# Altium PCB RT5572.PcbDoc
Units mil, origin at the board's own origin, x right, y up, seen from the top; angles counter-clockwise.
Board outline 785.62 x 1959.32 mil, 4 copper layers (Top Layer, GND, Signal Layer 1, Bottom Layer), stack 39.217 mil thick; 121 components, 64 nets, 363 pads, 199 vias.
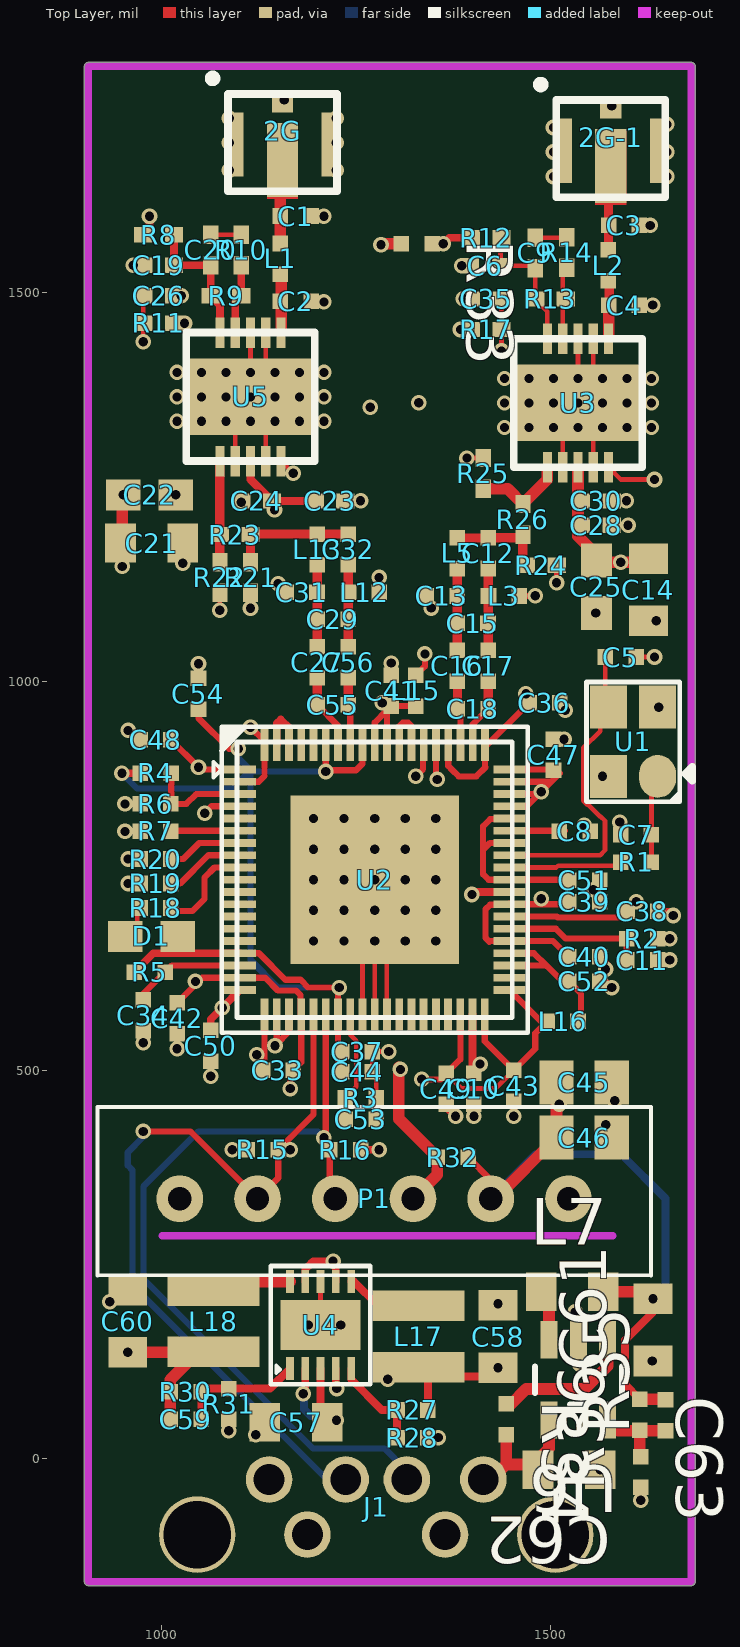
[diagram p0: Top Layer view]
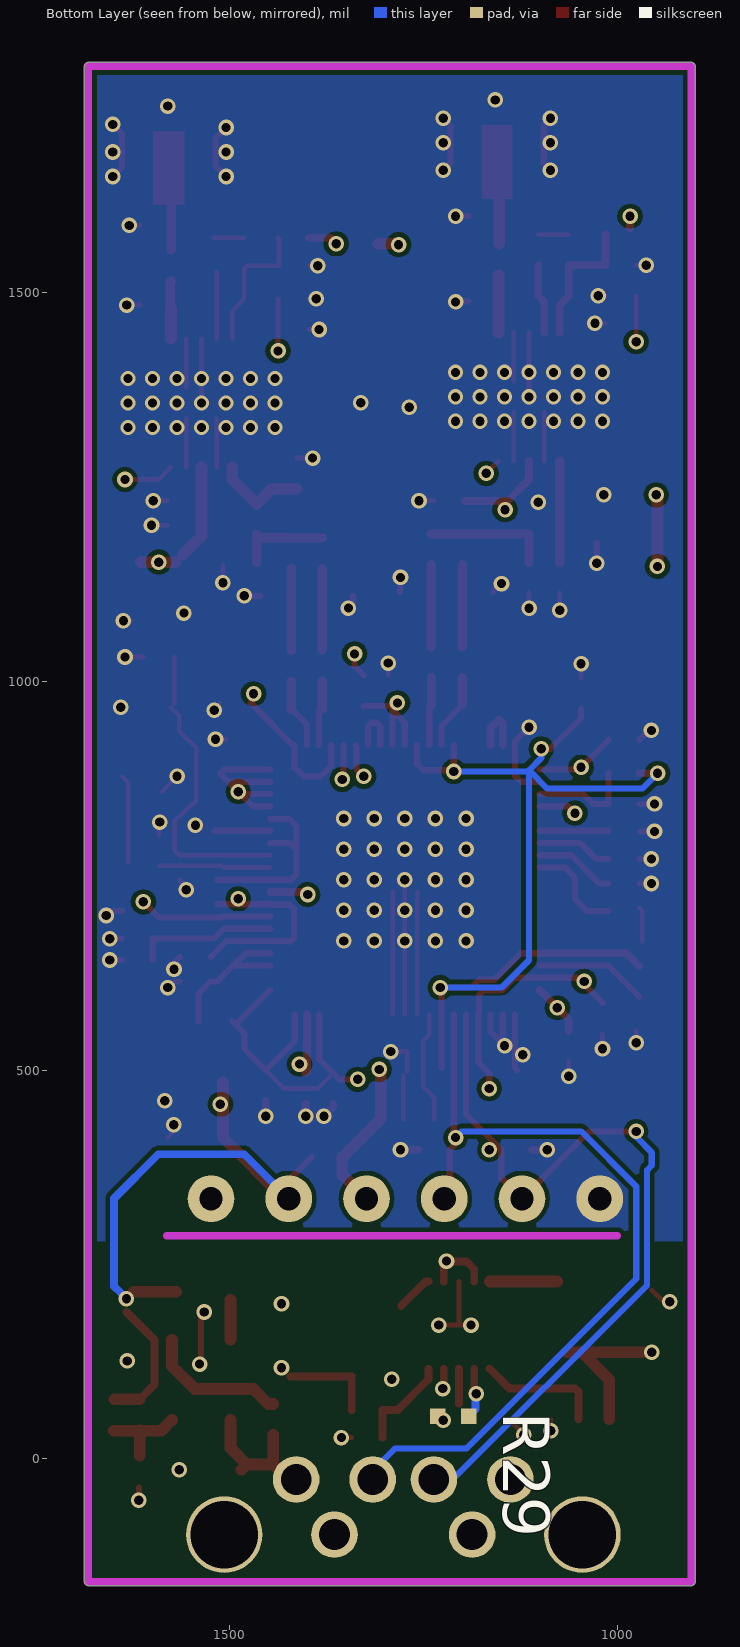
[diagram p1: Bottom Layer view, seen from below]
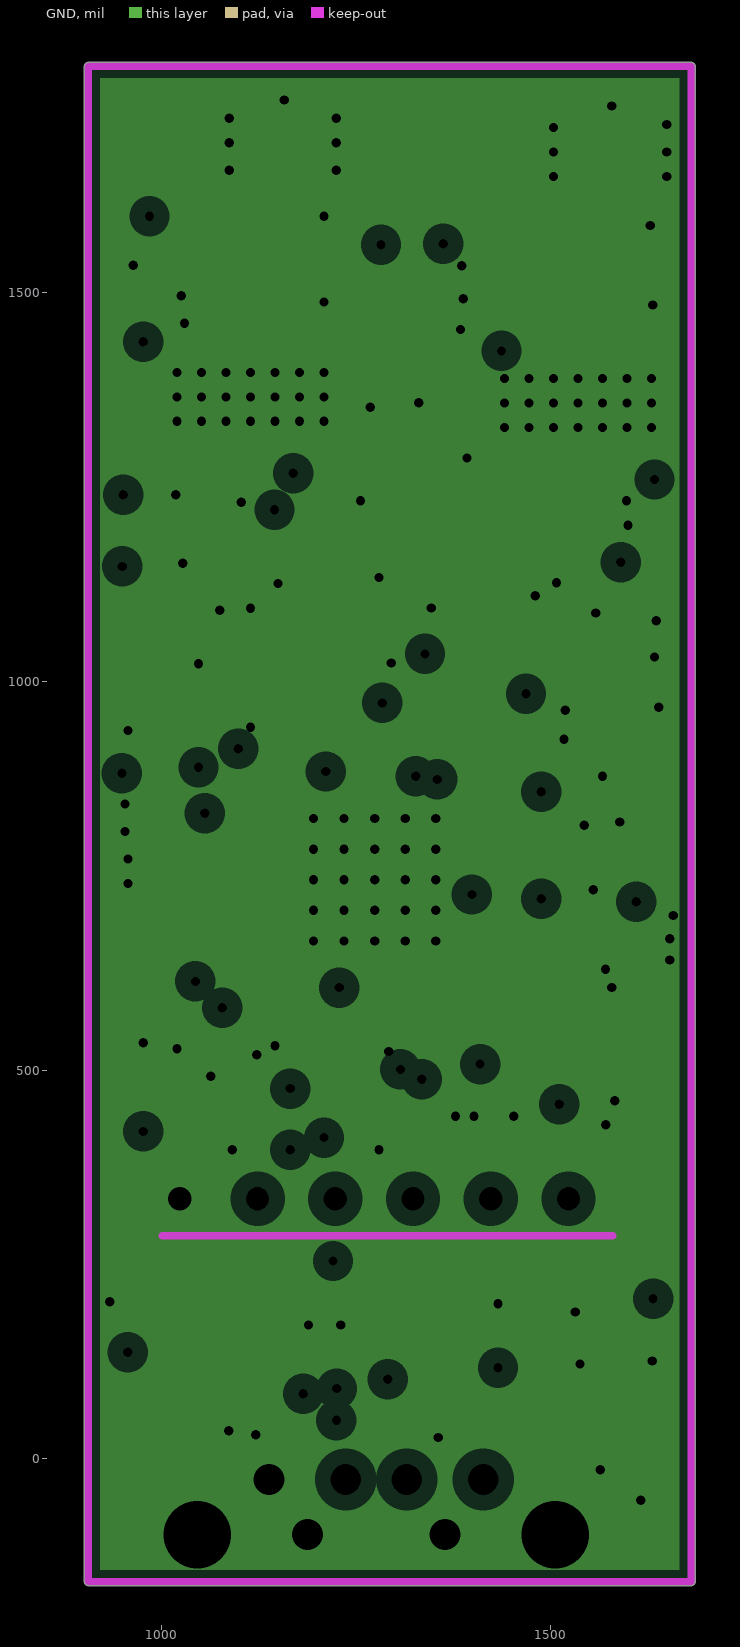
[diagram p2: GND, clearances drawn from the general rule]
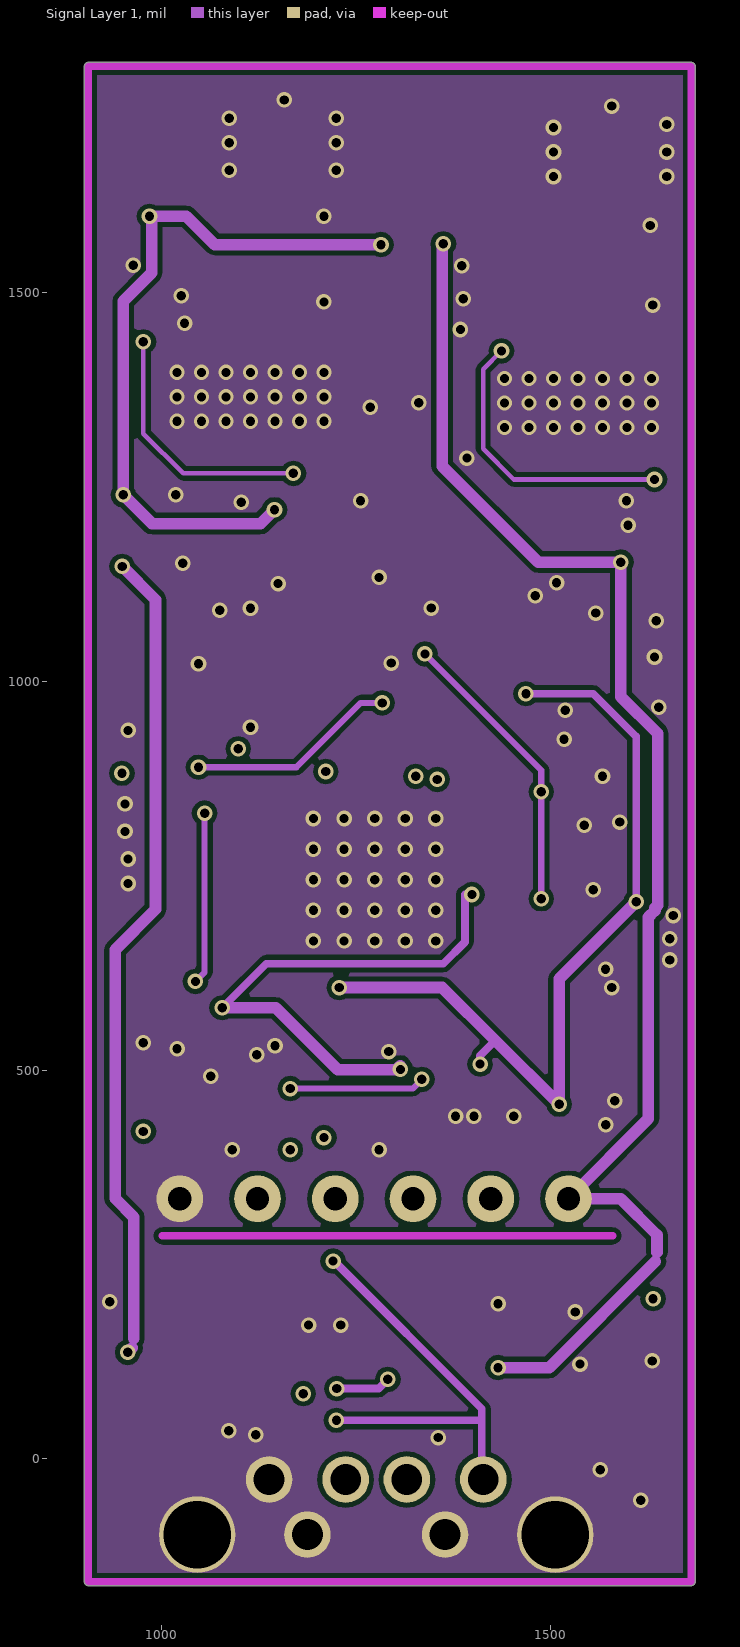
[diagram p3: Signal Layer 1]

## Layer stack, top to bottom
Top Solder: solder mask 0.4, Solder Resist, Dk 3.5
Top Layer: signal copper 1.4
Dielectric1: core 7.6772, FR-4, Dk 4.2
GND: plane copper 0.689, net GND
Dielectric 3: prepreg 19.685, Dk 4.2
Signal Layer 1: signal copper 0.689
Dielectric 2: core 7.6772, Dk 4.2
Bottom Layer: signal copper 1.4
Bottom Solder: solder mask 0.4, Solder Resist, Dk 3.5

## Board outline
905.51,-162.97 cw(c905.51,-157.95) 900.5,-157.95 900.5,1791.34 cw(c905.51,1791.34) 905.51,1796.35 1681.1,1796.35 cw(c1681.1,1791.34) 1686.12,1791.34 1686.12,-157.95 cw(c1681.1,-157.95) 1681.1,-162.97

## Design rules (kind name [scope] priority, off if disabled: settings)
Clearance [All] p1: gap=6
MinimumSolderMaskSliver [All] p1 off: minsoldermaskwidth=10
PlaneClearance [All] p1: clearance=20
PlaneConnect [All] p1: planeconnectstyle=Direct reliefexpansion=20 reliefentries=4 reliefconductorwidth=10 reliefairgap=10
PolygonConnect [All] p1: connectstyle=Direct reliefconductorwidth=10 reliefentries=4 polygonreliefangle="90 Angle" airgapwidth=10
RoomDefinition 4-USB-A [InComponentClass('4-USB-A')] p1 off: confinementstyle=ConfineIn formatcopy=TRUE lockcomponents=FALSE outline -5946.1,-8780 -3946.1,-8780 -3946.1,-7780 -5946.1,-7780
RoomDefinition 3-RT5572-WLAN [InComponentClass('3-RT5572-WLAN')] p2 off: confinementstyle=ConfineIn formatcopy=TRUE lockcomponents=FALSE outline -5946.1,-8780 -3946.1,-8780 -3946.1,-7780 -5946.1,-7780
RoomDefinition 2-FrontEnd [InComponentClass('2-FrontEnd')] p3 off: confinementstyle=ConfineIn formatcopy=TRUE lockcomponents=FALSE outline -5946.1,-8780 -3946.1,-8780 -3946.1,-7780 -5946.1,-7780
RoutingVias [All] p1: holewidth=12 width=20 viastyle="Through Hole" minholewidth=12 minwidth=20 maxholewidth=28 maxwidth=50
SilkToSilkClearance [All] p1 off: silktosilkclearance=10
SilkToSolderMaskClearance [IsPad] p1 off: minsilkscreentomaskgap=10 clearancetoexposedcopper=TRUE
SolderMaskExpansion [All] p1 off: expansion=4
UnpouredPolygon [All] p1: allowunpoured=FALSE
Width [All] p1: maxlimit=20 minlimit=6 preferedwidth=10
24 further rules are at their usual default settings.

## Classes and differential pairs
component class 2-FrontEnd: 2G 2G-1 5G C1 C2 C3 C4 C6 C9 C14 C19 C20 C21 C22 C23 C24 C25 C26 C28 C30 C35 L1 L2 R8 R9 R10 R11 R12 R13 R14 R17 R21 R22 R23 R24 R25 R26 R33 U3 U5
component class 3-RT5572-WLAN: C5 C7 C8 C10 C11 C12 C13 C15 C16 C17 C18 C27 C29 C31 C32 C33 C34 C36 C37 C38 C39 C40 C41 C42 C43 C44 C45 C46 C47 C48 C49 C50 C51 C52 C53 C54 C55 C56 D1 L3 L5 L12 L13 L15 L16 R1 R2 R3 R4 R5 R6 R7 R18 R19 R20 U1 U2
component class 4-USB-A: C57 C58 C59 C60 C61 C62 C63 J1 L7 L17 L18 P1 R15 R16 R27 R28 R29 R30 R31 R32 R34 R35 R36 U4 U6

## Components (designator, comment, footprint, x,y, rotation, side; value= is the part's Value field where it differs from the comment)
2G "IPEX" IPEX 1157.36,1688.74 r0 top
2G-1 "IPEX" IPEX 1579.57,1680.87 r0 top
C1 "0.3pF" 0402#1 1172.36,1598.74 r0 top
C2 "0.3pF" 0402#1 1172.36,1489.06 r0 top
C3 "0.3pF" 0402#1 1594.49,1586.61 r0 top
C4 "0.3pF" 0402#1 1594.49,1484.25 r0 top
C5 "8.2pF" 0402#1 1590.55,1031.5 r180 top
C6 "Cap" 0402#2 1416.08,1534.94 r0 top
C7 "47pF" 0402#1 1610.24,803.15 r180 top
C8 "22nF" 0402#1 1531.5,807.09 r180 top
C9 "Cap" 0402#2 1480.32,1551.18 r270 top
C10 "0.1uF" 0402#1 1401.57,476.38 r270 top
C11 "100pF" 0402#1 1618.11,641.73 r180 top
C12 "1.2pF" 0402#1 1420,1165 r90 top
C13 "1.2pF" 0402#1 1360,1110 r0 top
C14 "Cap" 0805#1 1625.98,1118.11 r270 top
C15 "NI" 0402#1 1400,1075 r180 top
C16 "1.2pF" 0402#1 1380,1020 r90 top
C17 "1.2pF" 0402#1 1420,1020 r90 top
C18 "1pF" 0402#1 1400,965 r0 top
C19 "Cap" 0402#2 996.06,1535.43 r0 top
C20 "Cap" 0402#2 1062.99,1555.12 r270 top
C21 "Cap" 0805#1 987,1178 r0 top
C22 "Cap" 0603 984,1240 r0 top
C23 "Cap" 0402#2 1216.54,1232.28 r0 top
C24 "Cap" 0402#2 1122.05,1232.28 r180 top
C25 "Cap" 0603 1559.06,1122.05 r270 top
C26 "Cap" 0402#2 996.06,1496.06 r0 top
C27 "2pF" 0402#1 1200,1025 r270 top
C28 "Cap" 0402#2 1559.06,1200.79 r0 top
C29 "1.2pF/NI" 0402#1 1220,1080 r180 top
C30 "Cap" 0402#2 1559.06,1232.28 r0 top
C31 "1pF" 0402#1 1180,1115 r180 top
C32 "1pF" 0402#1 1240,1170 r270 top
C33 "1uF" 0402#1 1149.61,500 r180 top
C34 "0.1uF" 0402#1 976.38,570.87 r270 top
C35 "Cap" 0402#2 1417.32,1492.13 r180 top
C36 "5.6pF" 0402#1 1492.13,972.44 r0 top
C37 "0.1uF" 0402#1 1251,524 r0 top
C38 "0.1uF" 0402#1 1618.11,704.72 r0 top
C39 "0.1uF" 0402#1 1543.31,716.54 r0 top
C40 "NI" 0402#1 1543.31,645.67 r0 top
C41 "1uF" 0402#1 1295.28,988.19 r90 top
C42 "0.1uF" 0402#1 1019.69,566.93 r270 top
C43 "1uF/NI" 0402#1 1452.76,480.32 r270 top
C44 "1uF" 0402#1 1251,498 r0 top
C45 "10uF" 0805#2 1543.31,484.25 r0 top
C46 "10uF" 0805#2 1543.31,413.39 r0 top
C47 "1uF" 0402#1 1503.94,905.51 r90 top
C48 "1uF" 0402#1 992.13,925.2 r180 top
C49 "0.1uF" 0402#1 1366.14,476.38 r270 top
C50 "1uF" 0402#1 1062.99,531.5 r270 top
C51 "1uF" 0402#1 1543.31,744.09 r0 top
C52 "0.1uF" 0402#1 1543.31,614.17 r0 top
C53 "1pF" 0402#1 1255.91,437.01 r0 top
C54 "0.1uF" 0402#1 1047.24,984.25 r90 top
C55 "1pF" 0402#1 1220,970 r180 top
C56 "2pF" 0402#1 1240,1025 r270 top
C57 "10UF" 0805#1 1172.72,47.18 r0 top
C58 "22UF" 0805#1 1432.56,157.42 r270 top
C59 "33pF" 0402#1 1030.98,51.12 r180 top
C60 "22UF" 0805#1 956.18,177.1 r270 top
C61 "Cap" 0805#1 1632,166 r90 top
C62 "Cap" 0805#1 1524,-14 r180 top
C63 "Cap" 0402#1 1615,57 r270 top
D1 "LED" 0603 987,672 r180 top
J1 "USB" USB-A-MALE 1275.59,-102.36 r270 top
L1 "1nH" 0402#1 1152.36,1543.74 r270 top
L2 "1nH" 0402#1 1574.57,1535.55 r270 top
L3 "3.0nH" 0402#1 1440,1110 r0 top
L5 "3.0nH" 0402#1 1380,1165 r270 top
L7 "2.2uH" 0805#1 1528,215 r0 top
L12 "2.7nH" 0402#1 1260,1115 r0 top
L13 "2.7nH" 0402#1 1200,1170 r270 top
L15 "0 ohm" 0402#1 1326.77,988.19 r270 top
L16 "0 ohm" 0402#1 1515.75,562.99 r180 top
L17 "2.2UH" L3015 1330.2,196.79 r270 top
L18 "3.3UH" L3015 1066.42,216.47 r270 top
P1 "*" 6PSocket 1173.23,334.65 r0 top
R1 "0 ohm" 0402#1 1610.24,767.72 r180 top
R2 "12K" 0402#1 1618.11,669.29 r180 top
R3 "8.2K" 0402#1 1255.91,464.57 r0 top
R4 "1K" 0402#1 992.13,881.89 r0 top
R5 "100K" 0402#1 984.25,625.98 r0 top
R6 "1K/NI" 0402#1 992.13,842.52 r180 top
R7 "4.7K" 0402#1 992.13,807.09 r180 top
R8 "Res2" 0402#2 996.06,1574.8 r0 top
R9 "Res2" 0402#2 1082.68,1496.06 r0 top
R10 "Res2" 0402#2 1102.36,1555.12 r270 top
R11 "Res2" 0402#2 996.06,1460.63 r180 top
R12 "Res2" 0402#2 1417.32,1570.87 r0 top
R13 "Res2" 0402#2 1500,1492.13 r0 top
R14 "Res2" 0402#2 1520.92,1551.67 r270 top
R15 "1M/NI" 0402#1 1129.92,397.64 r0 top
R16 "1M/NI" 0402#1 1236.22,397.64 r180 top
R17 "Res2" 0402#2 1417.32,1452.76 r0 top
R18 "330R" 0402#1 992.13,708.66 r180 top
R19 "4.7K" 0402#1 992.13,740.16 r180 top
R20 "4.7K" 0402#1 992.13,771.65 r180 top
R21 "TBD" 0402#2 1114.17,1133.86 r270 top
R22 "TBD" 0402#2 1074.8,1133.86 r90 top
R23 "TBD" 0402#2 1094.49,1188.98 r180 top
R24 "TBD" 0402#2 1488.19,1149.61 r180 top
R25 "TBD" 0402#2 1413.39,1267.72 r270 top
R26 "TBD" 0402#2 1464.57,1208.66 r90 top
R27 "270k" 0402#1 1322.32,62.93 r0 top
R28 "180k" 0402#1 1322.32,27.5 r0 top
R29 "10k" 0402#1 1212,55 r180 bottom
R30 "300k" 0402#1 1030.98,86.55 r180 top
R31 "68k" 0402#1 1086.1,70.8 r270 top
R32 "0R" 0402#1 1374,388 r0 top
R33 "NC/0R" 0402#1 1328,1563 r0 top
R34 "10k" 0402#1 1443,51 r270 top
R35 "45k" 0402#1 1648,56 r90 top
R36 "10k" 0402#1 1616,-17 r90 top
U1 "XTAL/3.2x2.5/40MHz/85C" XTAL-SMD/3.2X2.5 1606.3,921.26 r270 top
U2 "RT5572-QFN76" QFN40P-900X900X90-77N 1273.9,745 r0 top
U3 "Sky65174-21" SKY65174-21 1535.43,1358.27 r90 top
U4 "Tps62410" DFN-10P-3X3 1204.21,173.17 r90 top (schematic designator U3)
U5 "Sky65174-21" SKY65174-21 1114.17,1366.14 r90 top
U6 "RT8059" SOT23-5 1536.1,102 r180 top

## Footprints (in the part's own frame and the unit in brackets; to place one, negate y for a bottom-side part, rotate by r counter-clockwise, add the part's x,y. Pads: shape width x height; smd on the part's side, far side on the other; paste and mask are expansions set on the pad)
6PSocket [mil]
  round 60 hole 30: 1(-150,0) 2(-50,0) 3(50,0) 4(150,0) 5(250,0) 6(350,0)
  silkscreen extent -256,-99 456,118
0402#1 [mil] "0402-RES"
  rect 20x20 smd: 1(-19.69,0) 2(20,0)
0402#2 [mil] "Chip Capacitor, Body 1.0x0.5mm, IPC High Density"
  rect 23.62x19.68 smd: 1(-19.68,0) 2(19.69,0)
  body extent -22,-12 22,12, height 51
0603 [mil] "0603-RES"
  rect 44x40 smd: 1(-33.46,0) 2(34,0)
0805#1 [mil]
  rect 39.37x50 smd: 1(-40,0) 2(40,0)
  body extent -50,-30 50,30, height 31
0805#2 [mil]
  rect 44x57 smd: 1(-35.5,0) 2(35.5,0)
DFN-10P-3X3 [mm]
  rect 0.75x0.25 smd mask+0.064: 1(-1.451,0.999) 2(-1.451,0.499) 3(-1.451,-0.001) 4(-1.451,-0.501) 5(-1.451,-1.001) 6(1.4,-1.001) 7(1.4,-0.501) 8(1.4,-0.001) 9(1.4,0.499) 10(1.4,0.999)
  rect 1.64x2.6 smd: 11(-0.025,-0.001)
  silkscreen extent -1.96,-1.63 1.9,1.62
IPEX [mil]
  rect 40x95 smd: 1(-2,-18)
  rect 19.68x82.68 smd: 2(-62,2) 2(58,2)
  rect 27.56x27.56 smd: 2(-2,57)
  Top Layer region: -22,-68 18,-68 18,27 -22,27
  silkscreen extent -97,-58 68,92
L3015 [mm]
  rect 1x3 smd: 1(0,0) 2(2,0)
QFN40P-900X900X90-77N [mm]
  rect 1.05x0.254 smd mask+0: 1(-4.4,3.6) 2(-4.4,3.2) 3(-4.4,2.8) 4(-4.4,2.4) 5(-4.4,2) 6(-4.4,1.6) 7(-4.4,1.2) 8(-4.4,0.8) 9(-4.4,0.4) 10(-4.4,0) 11(-4.4,-0.4) 12(-4.4,-0.8) 13(-4.4,-1.2) 14(-4.4,-1.6) 15(-4.4,-2) 16(-4.4,-2.4) 17(-4.4,-2.8) 18(-4.4,-3.2) 19(-4.4,-3.6)
  rect 0.254x1.05 smd: 20(-3.601,-4.4) 21(-3.201,-4.4) 22(-2.801,-4.4) 23(-2.401,-4.4) 24(-2.001,-4.4) 25(-1.601,-4.4) 26(-1.201,-4.4) 27(-0.801,-4.4) 28(-0.401,-4.4) 29(-0.001,-4.4) 30(0.399,-4.4) 31(0.799,-4.4) 32(1.199,-4.4) 33(1.599,-4.4) 34(1.999,-4.4) 35(2.399,-4.4) 36(2.799,-4.4) 37(3.199,-4.4) 38(3.599,-4.4) 58(3.602,4.4) 59(3.202,4.4) 60(2.802,4.4) 61(2.402,4.4) 62(2.002,4.4) 63(1.602,4.4) 64(1.202,4.4) 65(0.802,4.4) 66(0.402,4.4) 67(0.002,4.4) 68(-0.398,4.4) 69(-0.798,4.4) 70(-1.198,4.4) 71(-1.598,4.4) 72(-1.998,4.4) 73(-2.398,4.4) 74(-2.798,4.4) 75(-3.198,4.4) 76(-3.598,4.4)
  rect 1.05x0.254 smd: 39(4.4,-3.6) 40(4.4,-3.2) 41(4.4,-2.8) 42(4.4,-2.4) 43(4.4,-2) 44(4.4,-1.6) 45(4.4,-1.2) 46(4.4,-0.8) 47(4.4,-0.4) 48(4.4,0) 49(4.4,0.4) 50(4.4,0.8) 51(4.4,1.2) 52(4.4,1.6) 53(4.4,2) 54(4.4,2.4) 55(4.4,2.8) 56(4.4,3.2) 57(4.4,3.6)
  rect 5.5x5.5 smd: 77(0,0)
  silkscreen extent -5.26,-5 5,5
SKY65174-21 [mm]
  rect 2.5x4.4 smd: 0(0,0)
  rect 1x0.3 smd: 1(-2.1,1) 2(-2.1,0.5) 3(-2.1,0) 4(-2.1,-0.5) 5(-2.1,-1) 6(2.1,-1) 7(2.1,-0.5) 8(2.1,0) 9(2.1,0.5) 10(2.1,1)
  silkscreen extent -2.1,-2.1 2.1,2.1
SOT23-5 [mil] "SOT23-5"
  rect 22x48 smd: 1(-37.4,-51.18) 2(0,-51.18) 3(38,-51.18) 4(38,52) 5(-37.4,52)
  silkscreen extent -56,-17 56,32
USB-A-MALE [mil]
  round 98.43 hole 86.61: 0(-5,230.63) 0(-5,-230)
  round 60 hole 40: 0(-5,88.9) 0(-5,-88.27) 4(-75.87,-137.48)
  round 60 hole 39.37: 1(-75.87,138.11) 2(-75.87,39.69) 3(-75.87,-39.06)
  body extent 3,-234 743,239, height 157
XTAL-SMD/3.2X2.5 [mm]
  oval 1.4x1.2 smd mask+0.051: 1(1.1,0.8)
  rect 1.4x1.2 smd mask+0.051: 2(-1.163,0.8) 3(-1.162,-0.8) 4(1.1,-0.8)
  silkscreen extent -1.98,-1.52 1.93,1.93

## Part data
2G 2G-1: library part ANT-RA-USB-1
C1 C2 C3 C4 C5 C7 C8 C10 C11 C12 C13 C15 C16 C17 C18 C27 C29 C31 C32 C33 C34 C36 C37 C38 C39 C40 C41 C42 C43 C44 C47 C48 C49 C50 C51 C52 C53 C54 C55 C56 C57 C58 C59 C60: library part CAP/0402
C6 C9 C14 C19 C20 C21 C22 C23 C24 C25 C26 C28 C30 C35 C61 C62 C63: "Capacitor"
C45 C46: library part CAP/0603
D1: library part LED/0603
L1 L2 L3 L5 L13 L15 L16: library part L/0402
L7: library part Inductor, "Inductor"
L12: library part L/0402_0
L17 L18: library part L/2.5*2.0
P1: library part 6PSocket
R1 R2 R5: library part RES/0402_1_Dup1
R3 R15 R16: library part RES/0402_2
R4 R6 R7 R19 R20: library part RES/0402_1_Dup2
R8 R9 R10 R11 R12 R13 R14 R17: "Resistor"
R18: library part RES/0402_1
R21 R22 R23 R24 R25 R26 R33 R34 R35 R36: library part Res2, "Resistor"
R27 R28 R29 R30 R31 R32: library part RES/0402_3
U1: library part XTAL_2.5
U2: library part RT5572_5

## Via types
v1: diameter 20, hole 12, Top Layer to Bottom Layer, 132 vias
v2: diameter 19.68, hole 11.81, Top Layer to Bottom Layer, 42 vias
v3: diameter 20/20/20 (per signal layer), hole 12, Top Layer to Bottom Layer, 25 vias

## Nets (pads, with @x,y where several pads share a name; then routed paths per layer and width w, separated by ;. In a path a pad name is that pad's centre, name@x,y a point inside that pad or via, vN(x,y) a via of type N, cw(c..) or ccw(c..) an arc to the next point about the centre after c; other vN are vias at no path point)
1.2VA: C52.1 L16.1 U2.41 U2.42 | length 198.8
  Top Layer w8: U2.41 1494.53,634.76 ; U2.42 1478.78,650.51 1494.53,634.76 ; 1496.06,633.23 1494.53,634.76 ; L16.1@1539.37,562.99 1539.37,598.43 C52.1 1515.12,614.17 1494.53,634.76
1.2VD: C33.1 C42.1 C43.1 C49.1 L16.2 U2.4 U2.18 U2.23 U2.36 U2.38 U2.39 | length 1206.1
  Top Layer w6: C49.1 1385.83,476.38 1429.13,476.38 C43.1
  Top Layer w8: C42.1 1052.08,619.01 U2.18 1132.96,619.01 1149.53,602.44 1172.77,602.44 1178.63,596.58 1178.63,572.52 U2.23 1179.38,510.09 C33.1 1165.35,496.06 v1(1165.35,476.38) ; v1(1055.12,830.71) 1063.89,839.49 U2.4 ; v1(1334.65,488.19) 1358.27,488.19 C49.1 1384.1,514.03 U2.36 ; U2.38 1415.6,537.16 C43.1 1480.32,527.56 1480.32,547.56 L16.2 ; U2.39 L16.2@1491.57,558.82
  Signal Layer 1 w8: v1(1043.31,614.17) 1055.12,625.99 v1(1055.12,830.71) ; v1(1165.35,476.38) 1322.83,476.38 v1(1334.65,488.19)
1.2VPLL: C51.1 U2.48 U2.51 U2.53 | length 241.6
  Top Layer w8: U2.51 1422.17,792.24 1413.39,783.46 ; U2.53 1446.38,822.99 1422.31,822.99 1413.39,814.06 1413.39,783.46 ; C51.1@1514.84,745 U2.48 1420.35,745 1413.39,751.97 1413.39,783.46
1.2VRF: C39.1 C40.1 C47.1 L15.1 U2.43 U2.46 U2.54 U2.55 U2.56 U2.57 | length 909.8
  Top Layer w8: L15.1 1338.58,1019.68 v1(1338.58,1035.43) ; U2.46@1447.13,714.25 U2.46 ; U2.54 1469.41,839.49 v1@1485.16,855.24 ; U2.55 v1@1485.16,855.24 ; U2.56 1500.91,870.98 ; U2.57 C47.1@1506.97,886.73 ; v1(1488.19,720.47) v1@1481.22,713.5 ; C47.1@1511.81,881.89 1500.91,870.98 ; C39.1@1514.84,713.5 v1@1481.22,713.5 ; C40.1 1503.03,666.26 U2.43 1422.17,666.26 1421.26,665.35 1416.46,670.16 1416.46,706.9 1422.31,712.76 1446.38,712.76 U2.46 ; U2.46 v1@1481.22,713.5 ; v1@1485.16,855.24 v1(1488.19,858.27) 1500.91,870.98
  Signal Layer 1 w8: v1(1338.58,1035.43) 1488.19,885.83 v1(1488.19,858.27) v1(1488.19,720.47)
1.2VRF1: C41.1 C48.1 L15.2 U2.1 U2.66 U2.67 | length 502.8
  Top Layer w8: C48.1 v1(1047.24,889.76) 1050.28,886.73 U2.1 ; U2.67 1273.97,947.19 1289.71,962.94 U2.66 ; C41.1 1326.46,968.5 L15.2
  Signal Layer 1 w8: v1(1047.24,889.76) 1173.23,889.76 1255.91,972.44 v1(1283.46,972.44)
3.3V: C10.1 C36.1 C37.1 C38.1 C44.1 C45.1 C46.1 C54.1 C61.2 C63.1 D1.1 L7.2 P1.5 R4.1 R5.1 R32.2 R35.2 U2.16 U2.26 U2.37 U2.45 U2.58 U2.61 U2.68 U2.71 | length 3669.5
  Top Layer w8: C54.1 1047.24,952.76 1086.61,913.39 v1(1098.43,913.39) ; U2.16 1125.08,650.51 1159.15,616.44 1178.57,616.44 1188.72,606.3 v1@1226.62,606.3 ; v1(1210.97,884.2) v1@1210.97,891.39 ; U2.71 v1@1210.97,891.39 ; v1@1224.41,602.36 v1@1226.62,604.58 ; C44.1@1226.62,502.69 U2.26 v1@1226.62,604.58 ; U2.68 1258.22,894.17 1249.88,885.83 1216.54,885.83 v1@1210.97,891.39 ; U2.61 1368.45,891.39 1374.02,885.83 1381.89,877.95 1404.65,877.95 1416.46,889.76 1415.7,890.52 U2.58 1418.23,918.23 C36.1 ; R32.2 P1.5@1423.23,358.77 ; U2.37@1399.1,572.52 U2.37 ; U2.45 1508.26,697.76 1509.48,696.54 1590.24,696.54 C38.1 v1(1610.24,716.54) ; v1@1226.62,604.58 v1(1228.34,606.3) v1@1226.62,606.3 ; v1@1226.62,604.58 v1@1226.62,606.3
  Top Layer w10: v1(948.82,881.89) R4.1 ; R5.1@972.44,633.86 989.09,650.51 U2.16 ; U2.37 1399.85,497.79 C10.1 1401.57,500 v1(1409.45,507.87) ; C63.1 1596,95.68 1596,153 C61.2@1632,189
  Top Layer w15: P1.5 1429.07,334.65 C46.1 C45.1 ; v1(1511.18,456.13) C45.1@1511.74,456.69 ; L7.2 C61.2@1623,215 ; C63.1 R35.2@1647.32,76.68
  Signal Layer 1 w10: v1(1409.45,507.87) 1409.45,518.49 1429.13,538.18 ; v1(1468.5,984.25) 1555.12,984.25 1610.24,929.13 v1(1610.24,716.54)
  Signal Layer 1 w15: v1(1228.34,606.3) 1361.01,606.3 1429.13,538.18 v1(1511.18,456.13) 1511.18,617.48 v1(1610.24,716.54)
  Bottom Layer w8: v1(948.82,881.89) 968.5,862.2 1090.55,862.2 1114.17,885.83 ; v1(1098.43,913.39) 1098.43,901.57 1114.17,885.83 ; v1(1210.97,884.2) 1115.8,884.2 1114.17,885.83 ; v1(1228.34,606.3) 1149.61,606.3 1114.17,641.73 1114.17,885.83
  Bottom Layer w10: P1.5 1480.58,392 1591,392 1648,335 1648,222 ; v1(1632,206) 1646,220
20MX2: R1.2 U2.49 | length 144.1
  Top Layer w6: U2.49 1507.55,760.75 1509.89,763.09 R1.2@1590.24,763.09
BG_RES_12K: C11.2 R2.2 U2.44 | length 183.8
  Top Layer w8: U2.44 1507.08,682.01 1519.74,669.35 R2.2 R2.2 C11.2
C20_2: C13.2 C15.2 C16.2 L5.2 | length 105
  Top Layer w12: C16.2 C15.2 C13.2 L5.2
C36_1: U2.73
C40_1: C27.1 C29.2 C31.1 L13.2 | length 105.3
  Top Layer w12: C27.1 C29.2 L13.2
EFUSE: R19.1 U2.8 | length 103.9
  Top Layer w8: R19.1 1023.62,740.16 1059.96,776.49 U2.8
GND: 2G-1.2 2G.2 C1.2 C2.2 C3.2 C4.2 C5.1 C6.1 C7.2 C8.1 C10.2 C11.1 C13.1 C14.2 C19.1 C21.2 C22.2 C23.2 C24.2 C25.2 C26.2 C28.2 C30.2 C31.2 C33.2 C34.2 C35.2 C36.2 C37.2 C38.2 C39.2 C40.2 C41.2 C42.2 C43.2 C44.2 C45.2 C46.2 C47.2 C48.2 C49.2 C50.2 C51.2 C52.2 C53.2 C54.2 C57.1 C58.1 C60.1 C61.1 C62.1 J1.0 J1.4 L3.2 L12.2 P1.1 R2.1 R3.2 R6.2 R7.2 R11.1 R15.1 R16.1 R17.1 R19.2 R20.2 R21.2 R22.1 R24.1 R25.1 R28.2 R31.2 R36.1 U1.2 U1.4 U2.2 U2.20 U2.21 U2.22 U2.28 U2.29 U2.30 U2.76 U2.77 U3.0 U3.2 U3.4 U3.7 U3.8 U4.8 U4.11 U5.0 U5.2 U5.4 U5.7 U5.8 U6.2 | length 2939.6
  Top Layer w6: v1(933,202) 941.08,202 C60.1 ; v1(963.43,1535.43) C19.1 ; v1(976.38,535.43) C34.2 ; R11.1 v1(1029.37,1460.63) ; C26.2 v1(1025.06,1496.06) ; v1(1019.69,527.56) C42.2 ; C54.2 v1(1047.24,1022.76) ; v1(1062.99,492.13) C50.2 ; v1(1074.8,1091.8) R22.1 ; v1(1086.1,36.1) R31.2 ; U5.2 U5.0@1094.49,1346.46 ; v1(1102.36,1230.64) C24.2 ; v1(1114.17,1094.17) R21.2 ; v2(1114.17,1366.14) v2(1114.17,1397.64) U5.8 ; v1(1121,31) 1121,32 1136.18,47.18 C57.1 ; U5.4 U5.0@1133.86,1346.46 ; U5.0@1133.86,1385.83 U5.7 ; v1(1188.83,172.17) U4.11 ; U4.8 U4.11 ; v1(1230.17,172.17) U4.11 ; C23.2 v1(1255.72,1232.28) ; U2.28 U2.77@1258.12,729.22 ; v1@1267.72,1352.9 v1(1268.1,1352.9) ; C44.2 C37.2 v1(1292,524) ; U2.29 v3(1273.9,745) ; C53.2 R3.2 C44.2@1275.91,493.09 ; U2.30 U2.77@1289.62,729.28 ; C41.2 v1(1295.28,1023.72) ; v1(1330.71,1358.71) v1@1330.71,1358.9 ; R28.2 v1(1355.5,27.5) ; v1(1384.24,1452.76) R17.1 ; v1(1385.94,1534.94) C6.1 ; v1(1387.87,1492.13) C35.2 ; v1(1392.6,1287.4) R25.1 ; C58.1 v1(1432.56,199.44) ; C47.2 v1(1517.49,925.51) ; v1(1507.87,1126.87) R24.1 ; C36.2 1519,965.57 v1(1519,963) ; U3.2 U3.0@1515.75,1338.58 ; v2(1535.43,1358.27) v2(1535.43,1389.76) U3.8 ; U3.4 U3.0@1555.12,1338.58 ; U3.0@1555.12,1377.95 U3.7 ; v1(1558.05,1088.05) C25.2 ; v1(1571,430) 1571,421.19 C46.2 ; U1.4 v1(1566.93,877.95) U1.4@1586.61,858.27 ; C28.2 v1(1599.79,1200.79) ; C30.2 v1(1597.72,1232.28) ; v1(1589.24,819.21) 1590.24,819.21 C7.2 ; C5.1 v1(1633.86,1031.5) ; C4.2 v1(1631.75,1484.25) ; C3.2 v1(1628.39,1586.61) ; C14.2 v1(1635.89,1078.11) ; U1.2 v1(1639.24,967.06)
  Top Layer w8: v1(952.76,807.09) R7.2 ; v1(952.76,842.52) R6.2 ; v1(956.69,740.16) R19.2 ; v1(956.69,771.65) R20.2 ; v1(956.69,937.01) 960.32,937.01 C48.2 ; v1(1027,1152) C21.2 ; v1(1086.61,1657.48) 1095.36,1666.23 2G.2@1095.36,1690.74 ; v1(1086.61,1692.91) 1093.19,1692.91 2G.2@1095.36,1690.74 ; v1(1086.61,1724.41) 1095.36,1715.66 2G.2@1095.36,1690.74 ; U2.2 1124.73,870.98 1132.23,878.48 U2.76 1132.23,922.88 v1(1114.17,940.94) ; v1(1122.05,519.68) 1132.14,519.68 ; C33.2 1132.14,502.53 1132.14,519.68 ; U2.20 1132.14,519.68 ; v1(1145.67,531.5) v1@1147.88,533.71 ; U2.21 v1@1147.88,533.71 ; v1(1149.61,1125.98) 1160,1115.59 C31.2 ; 2G.2@1155.36,1745.74 1155.36,1745.91 v1(1157.48,1748.03) ; U2.22 1163.63,549.46 v1@1147.88,533.71 ; C2.2 1207.8,1489.06 v1(1208.66,1488.19) ; C1.2 1208.35,1598.74 v1(1208.66,1598.43) ; v1(1224.41,1657.48) 1215.36,1666.53 2G.2@1215.36,1690.74 ; v1(1224.41,1692.91) 1222.24,1690.74 2G.2@1215.36,1690.74 ; v1(1224.41,1724.41) 1215.36,1715.36 2G.2@1215.36,1690.74 ; v1(1279.53,1133.86) 1280,1133.39 L12.2 ; C13.1 1340.32,1100.63 v1(1346.46,1094.49) ; L3.2 1480.08,1110 v1(1480.32,1110.24) ; v1(1503.94,1649.61) 1517.57,1663.24 2G-1.2@1517.57,1682.87 ; v1(1503.94,1681.1) 1505.7,1682.87 2G-1.2@1517.57,1682.87 ; v1(1503.94,1712.6) 1517.57,1698.97 2G-1.2@1517.57,1682.87 ; v1(1532,189) 1536,189 1536.1,188.9 U6.2 1536.1,123.9 v1(1538,122) ; v1(1555.12,732.28) 1555.12,735.91 C51.2 ; C52.2 1570.87,614.17 v1(1578.74,606.3) ; C40.2 1574.8,634.17 1574.8,631.51 1573.21,629.92 v1(1570.86,629.92) ; 2G-1.2@1577.57,1737.87 1578.74,1739.04 v1(1578.74,1740.16) ; v1(1616,-53) R36.1 ; v1(1631,126) C61.1 ; C11.1 v1(1653.54,641.73) ; R2.1 v1(1653.54,669.29) ; C38.2 v1@1652.28,704.72 ; v1(1649.61,1649.61) 1637.57,1661.65 2G-1.2@1637.57,1682.87 ; v1(1649.61,1681.1) 1647.84,1682.87 2G-1.2@1637.57,1682.87 ; v1(1649.61,1716.54) 1637.57,1704.5 2G-1.2@1637.57,1682.87 ; v1@1658,693.75 v1(1658,699)
  Top Layer w10: v1(1090.55,397.64) R15.1 ; R16.1 v1(1279.53,397.64) ; C49.2 1366.14,452.76 v1(1377.95,440.94) ; v1(1401.57,440.94) C10.2 ; v1(1452.76,440.94) C43.2 ; v1(1582.68,460.63) v1(1582.68,460.63) C45.2@1582.74,456.69
  Signal Layer 1 w8: v1@1531,190 v1(1532,189) ; v1@1537,123 v1(1538,122)
  Bottom Layer w6: v1(1589.24,819.21) v1@1589.24,820.21
  other v1: 1564,-14 1543.31,814.96 1018,1240
  other v2: 1440.94,1326.77 1472.44,1326.77 1503.94,1326.77 1535.43,1326.77 1566.93,1326.77 1598.43,1326.77 1629.92,1326.77 1019.69,1334.65 1051.18,1334.65 1082.68,1334.65 1114.17,1334.65 1145.67,1334.65 1177.17,1334.65 1208.66,1334.65 1440.94,1358.27 1472.44,1358.27 1503.94,1358.27 1566.93,1358.27 1598.43,1358.27 1629.92,1358.27 1019.69,1366.14 1051.18,1366.14 1082.68,1366.14 1145.67,1366.14 1177.17,1366.14 1208.66,1366.14 1440.94,1389.76 1472.44,1389.76 1503.94,1389.76 1566.93,1389.76 1598.43,1389.76 1629.92,1389.76 1019.69,1397.64 1051.18,1397.64 1082.68,1397.64 1145.67,1397.64 1177.17,1397.64 1208.66,1397.64
  other v3: 1195.16,666.26 1234.53,666.26 1273.9,666.26 1313.27,666.26 1352.64,666.26 1195.16,705.63 1234.53,705.63 1273.9,705.63 1313.27,705.63 1352.64,705.63 1195.16,745 1234.53,745 1313.27,745 1352.64,745 1195.16,784.37 1234.53,784.37 1273.9,784.37 1313.27,784.37 1352.64,784.37 1195.16,823.74 1234.53,823.74 1273.9,823.74 1313.27,823.74 1352.64,823.74
GPIO9: R20.1 U2.7 | length 97.4
  Top Layer w8: R20.1 1027.56,771.65 1048.15,792.24 U2.7
L5_1: C12.1 C15.1 C17.2 L3.1 | length 105.3
  Top Layer w12: C17.2 C12.1
L13_1: C29.1 C32.2 C56.1 L12.1 | length 105.3
  Top Layer w12: C56.1 C32.2
LD1P_ACT: D1.2 R18.2 | length 44.8
  Top Layer w6: D1.2@968.5,665.35 968.5,705.04 R18.2
LED_ACT_N: R18.1 U2.9 | length 128.2
  Top Layer w8: R18.1@1011.81,704.72 1039.37,704.72 1055.12,720.47 1055.12,748.03 1067.83,760.75 U2.9
Net2G-1_1: 2G-1.1 C3.1 L2.1 | length 108.9
  Top Layer w12: L2.1 1574.57,1659.87 2G-1.1
Net2G_1: 2G.1 C1.1 L1.1 | length 108.6
  Top Layer w12: 2G.1@1152.36,1667.74 2G.1
  Top Layer w15: L1.1 2G.1@1152.36,1667.74
NetC2_1: C2.1 L1.2 U5.6 | length 73.7
  Top Layer w15: U5.6 L1.2@1153.54,1522.56
NetC4_1: C4.1 L2.2 U3.6 | length 74.2
  Top Layer w12: L2.2 1575.65,1514.47 C4.1@1575.65,1480.55
  Top Layer w15: U3.6 C4.1@1574.8,1479.71
NetC5_2: C5.2 U1.3 U2.50 | length 396.5
  Top Layer w6: U2.50 1563.9,776.5 1570.18,782.78 1570.18,820.81 1564.91,826.09 1563.9,826.09 1548.59,841.39 1547.45,841.39 1542.18,846.66 1542.18,914.51 1563.9,936.23 1563.9,956.09 U1.3 ; U1.3@1570.55,971.24 C5.2
NetC6_2: C6.2 C9.2 R12.2 R13.1 U3.10 | length 179.5
  Top Layer w6: R12.2 1435.77,1569.62 C6.2 1476.87,1534.94 C9.2 R13.1 1496.06,1476.38 U3.10
NetC9_1: C9.1 R14.1 | length 40.1
  Top Layer w6: C9.1 R14.1@1520.43,1570.87
NetC19_2: C19.2 C20.2 R8.2 R9.1 U5.10 | length 178.1
  Top Layer w10: R8.2 C19.2 C20.2 R9.1 1074.8,1484.25 U5.10
NetC20_1: C20.1 R10.1 | length 39.4
  Top Layer w6: C20.1 R10.1
NetC26_1: C26.1 R11.2 U5.5 | length 413.5
  Top Layer w6: v1(976.38,1437.01) R11.2 C26.1 ; U5.5 v1(1169.29,1267.72)
  Signal Layer 1 w6: v1(976.38,1437.01) 976.38,1318.9 1027.56,1267.72 v1(1169.29,1267.72)
NetC35_1: C35.1 R17.2 U3.5 | length 505.1
  Top Layer w6: v1(1437.01,1425.2) R17.2 C35.1 ; U3.5 1590.55,1259.84 v1(1633.86,1259.84)
  Signal Layer 1 w6: v1(1437.01,1425.2) 1413.39,1401.57 1413.39,1299.21 1452.76,1259.84 v1(1633.86,1259.84)
NetC59_1: C59.1 R30.1 R31.1 U4.1 | length 156.3
  Top Layer w10: C59.1 R30.1 ; R30.1@1054.61,90.49 R31.1 1139.32,90.49 U4.1
NetC63_2: C63.2 R35.1 R36.2 U6.5 | length 113.2
  Top Layer w15: U6.5 1587.19,36.32 C63.2@1615,36.32 ; R36.2@1615,4 C63.2@1615,36.32 ; C63.2 C63.2@1615,36.32 ; R35.1 C63.2@1615,36.32
NetL7_1: L7.1 U6.3 | length 51.7
  Top Layer w15: U6.3 L7.1@1498.1,204.9
NetL17_1: L17.1 U4.6 | length 48.1
  Top Layer w10: U4.6 1247.14,228.29 L17.1@1278.65,196.79
NetL18_1: L18.1 U4.10 | length 86.6
  Top Layer w15: L18.1@1078.24,228.29 U4.10
NetR9_2: R9.2 R10.2 U5.9 | length 89.9
  Top Layer w10: U5.9 1094.49,1488.19 R9.2 R10.2
NetR13_2: R13.2 R14.2 U3.9 | length 85.9
  Top Layer w6: U3.9 R14.2@1515.75,1526.81
NetR22_2: R22.2 R23.2 U5.1 | length 129.9
  Top Layer w12: R22.2 R23.2 U5.1
NetR25_2: R25.2 R26.2 U3.1 | length 119.6
  Top Layer w15: R25.2 1444.88,1248.03 R26.2 1496.06,1259.84 U3.1
NetR27_1: R27.1 R28.1 U4.5 | length 124.5
  Top Layer w10: U4.5 1243.62,102.27 1282.95,62.93 R27.1 R28.1
NetR29_2: R29.2 U4.2 | length 71.7
  Top Layer w10: v1(1182,84) 1182,83.91 1183.91,82 1184.56,82.65 U4.2
  Bottom Layer w10: v1@1180,82 v1(1182,84) ; v1@1183,83 1183,64 R29.2
NetR34_1: R34.1 U6.1 | length 184.4
  Top Layer w15: R34.1 1449.6,70.68 1468.92,90 1544,90 1573.5,119.5 U6.1
PA_OUT1N: C27.2 C55.2 U2.70 | length 97.8
  Top Layer w8: C55.2 1226.72,943.28 U2.70
  Top Layer w12: C55.2 C27.2
PA_OUT1P: C55.1 C56.2 U2.69 | length 88.1
  Top Layer w8: C55.1 1242.47,967.22 U2.69 ; C56.2@1239.69,1004.68 C56.2
  Top Layer w12: C55.1 C56.2@1239.69,1004.68
PLL_VC_CAP: C8.2 U2.52 | length 71.3
  Top Layer w8: U2.52 C8.2@1518.46,807.99
RF0_2G: C12.2 L5.1 R24.2 R26.1 | length 116.2
  Top Layer w12: L5.1 1419.69,1184.68 C12.2 R26.1@1460.59,1185 ; R24.2@1464.57,1153.54 R26.1
RF0_5G_PA2_V33: U2.63 | length 44.5
  Top Layer w8: v1(1326.77,877.95) 1336.21,887.39 1336.21,917.48 U2.63
RF0_5G_TXRX: U2.64 U2.65 | length 68.2
  Top Layer w8: U2.65 1305.46,942.46 1310,947 1317,947 1321.21,942.79 U2.64
RF0_PA1_V33A: U2.62 | length 44.9
  Top Layer w8: U2.62 1352.71,875.64 v1(1354.33,874.01)
RF1_2G: C32.1 L13.1 R21.1 R23.1 | length 160.6
  Top Layer w12: R21.1 R23.1 ; R23.1@1114.88,1189.68 L13.1 C32.1
RF1_5G_TXRX: U2.74 U2.75 | length 72.1
  Top Layer w10: U2.75 1147.98,945.98 1153,951 1163.73,940.27 U2.74
RF1_PA1_V33A: U2.72
RF_BIST: R7.1 U2.6 | length 89.2
  Top Layer w8: R7.1 1012.71,807.99 U2.6
RF_OUT0N: C16.1 C18.1 U2.60 | length 83.8
  Top Layer w8: C18.1 1384.2,961.11 U2.60
  Top Layer w12: C16.1 1380.32,1000 C18.1
RF_OUT0P: C17.1 C18.2 U2.59 | length 90.4
  Top Layer w8: U2.59 1399.95,944.95 C18.2
  Top Layer w12: C18.2 C17.1
RST_N: C34.1 R5.2 U2.17 | length 144.9
  Top Layer w8: C34.1@972.44,594.49 1011.81,633.86 1012.13,633.86 1013.03,634.76 U2.17
U3_1: C7.1 R1.1 U1.1 | length 113.5
  Top Layer w6: R1.1 1629.92,870.07 U1.1
UDM: J1.2 P1.3 R16.2 U2.25 | length 1076.5
  Top Layer w8: v1(1208.66,413.39) 1208.66,405.2 R16.2 P1.3@1216.22,341.65 ; v1@1210.88,417.32 U2.25
  Bottom Layer w8: v1(1208.66,413.39) 1200.79,421.26 1047.24,421.26 976.38,350.39 976.38,231.62 1194.5,13.5 1286.5,13.5 1313.28,-13.28 J1.2@1313.28,-38.5
UDP: J1.3 P1.2 R15.2 U2.24 | length 1038.8
  Top Layer w8: v1(976.38,421.26) 1036.61,421.26 P1.2 1149.92,361.34 R15.2 1195.13,442.84 U2.24
  Bottom Layer w8: v1(976.38,421.26) 976.38,414.11 956.38,394.11 956.38,377.54 962.38,371.54 962.38,223.62 1224.5,-38.5 J1.3@1234.54,-38.5
  other v1: 1165.35,397.64
UV+: C57.2 C62.2 J1.1 R29.1 R34.2 U4.3 U4.7 U4.9 U6.4 | length 894.1
  Top Layer w10: U4.9 1184.56,244.06 1192.4,251.91 1192.62,251.91 1194.77,254.06 v1@1217.81,254.06 ; C57.2@1204.25,71.4 U4.3 ; v1(1220.32,254.53) 1220.32,255.23 1219.96,255.59 1219.96,251.91 1223.93,247.94 U4.7
  Top Layer w15: J1.1@1399.14,-38.5 1411.7,-38.5 1443,-7.2 ; R34.2 1443,-7.2 ; C62.2 C62.2@1477.2,-7.2 ; U6.4 1498.1,13.71 C62.2@1477.2,-7.2 ; 1443,-7.2 C62.2@1477.2,-7.2
  Signal Layer 1 w10: v1(1220.32,254.53) 1220.32,255.95 1411.7,64.57 J1.1@1411.7,-38.5 ; v1(1224.69,49.68) 1411.02,49.68
VCORE: C50.1 P1.4 R32.1 U2.19 U2.47 | length 1008.1
  Top Layer w10: C50.1 1062.99,565.59 v1(1077.7,580.3) U2.19 ; v1@1402.25,729.25 U2.47
  Top Layer w15: v1(1307,501) 1307,501.77 1305,503.77 1305,437.32 R32.1 1354.32,365.73 P1.4
  Signal Layer 1 w10: v1(1077.7,580.3) 1134.4,637 1362,637 1390,665 1390,726 v1(1399,726)
  Signal Layer 1 w15: v1(1077.7,580.3) 1146.7,580.3 1226.5,500.5 1301.73,500.5 1307,505.77 v1(1307,501)
  Bottom Layer w10: v1@1397,728 v1(1399,726)
VPA1: C14.1 C25.1 C28.1 C30.1 C58.2 L17.2 P1.6 R12.1 R27.2 R33.2 U3.3 U4.4 | length 2292
  Top Layer w10: U4.4 1223.93,90.52 v1(1225.25,90.52) ; R27.2 1342.32,105.92 C58.2@1421.06,105.92 ; v1(1362.2,1562.99) 1370.08,1570.87 R12.1
  Top Layer w15: U3.3 1535.43,1187.01 C25.1@1559.06,1163.39 ; C25.1@1568.9,1153.54 v1(1590.55,1153.54) C14.1@1613.54,1153.54
  Signal Layer 1 w10: v1(1225.25,90.52) 1279.05,90.52 v1(1290.83,102.3)
  Signal Layer 1 w15: v1(1362.2,1562.99) 1360.74,1561.53 1360.74,1277.05 1484.25,1153.54 v1(1590.55,1153.54) 1590.55,980.31 1637.8,933.07 1637.8,712.03 1634.5,708.73 1634.5,705.37 1625.98,696.85 1625.98,437.4 P1.6 1590.35,334.65 1637,288 1637,266 ; v1(1432.56,117.42) 1498.42,117.42 1635,254
VPA2: C21.1 C22.1 C23.1 C24.1 C59.2 C60.2 L18.2 R8.1 R30.2 R33.1 U5.3 | length 2419.1
  Top Layer w10: R8.1@984.25,1582.68 v1(984.25,1598.43) ; U5.3 1114.17,1259.84 C24.1 C23.1
  Top Layer w15: v1(949,1148) 949,1238.46 v1(950.54,1240) ; v1(956.18,137.1) L18.2@1046.1,137.1 ; C59.2 R30.2 1010.98,101.98 L18.2@1046.1,137.1 ; L18.2@1046.73,137.73 L18.2@1046.1,137.1 ; L18.2@1065.79,137.1 L18.2@1046.1,137.1 ; v1(1282,1562) 1283,1563 R33.1
  Signal Layer 1 w15: v1(949,1148) 992,1105 992,707 940,655 940,335 964,311 964,154.92 ; v1(956.18,137.1) v1@962,142.92 ; v1(1145,1221) 1127,1203 987.54,1203 v1(950.54,1240) 950.54,1489.3 986.93,1525.7 986.93,1595.74 v1(984.25,1598.43) 1031.57,1598.43 1068,1562 v1(1282,1562)
VRES: C53.1 R3.1 U2.27 | length 143.9
  Top Layer w6: C53.1 R3.1 1250.32,478.66 1250.32,537.73 1242.37,545.67 U2.27
XTAL_40: R4.2 R6.1 U2.3 | length 133.6
  Top Layer w8: R4.2 1012.13,842.83 R6.1 1031.5,842.52 1044.21,855.23 U2.3
pads on no net: U2.5 U2.10 U2.11 U2.12 U2.13 U2.14 U2.15 U2.31 U2.32 U2.33 U2.34 U2.35 U2.40

## Polygon pours and split planes (outlines as drawn)
GND on Bottom Layer "Top Layer-No Net" (solid, remove dead copper, pour order 2): 897,281 898,280 1689,280 1689,1791.12 1684.94,1795.18 1683.02,1793.26 900.88,1793.26
GND on Signal Layer 1 "Top Layer-No Net" (solid, remove dead copper, pour order 4): 905.51,-163.38 1681.1,-163.38 1686.53,-157.95 1686.12,-157.54 1686.12,1791.34 910.53,1791.34 905.51,1796.35
GND on GND (split plane): 1666.02,-142.87 920.59,-142.87 920.59,1776.26 1666.02,1776.26

## Keep-outs
Keep-Out Layer:
  lines w10: 1001,287 1579.74,287 ; 905.51,-157.95 1681.1,-157.95 1681.1,1791.34 905.51,1791.34 905.51,-157.95